# Altium PCB BB_PowerSupply_Module.PcbDoc
Units mil, origin at the board's own origin, x right, y up, seen from the top; angles counter-clockwise.
Board outline 6000 x 4000 mil, 2 copper layers (Top Layer, Bottom Layer); 33 components, 22 nets, 69 pads, 0 vias.
Unrouted connection lines stored in the file: 9.
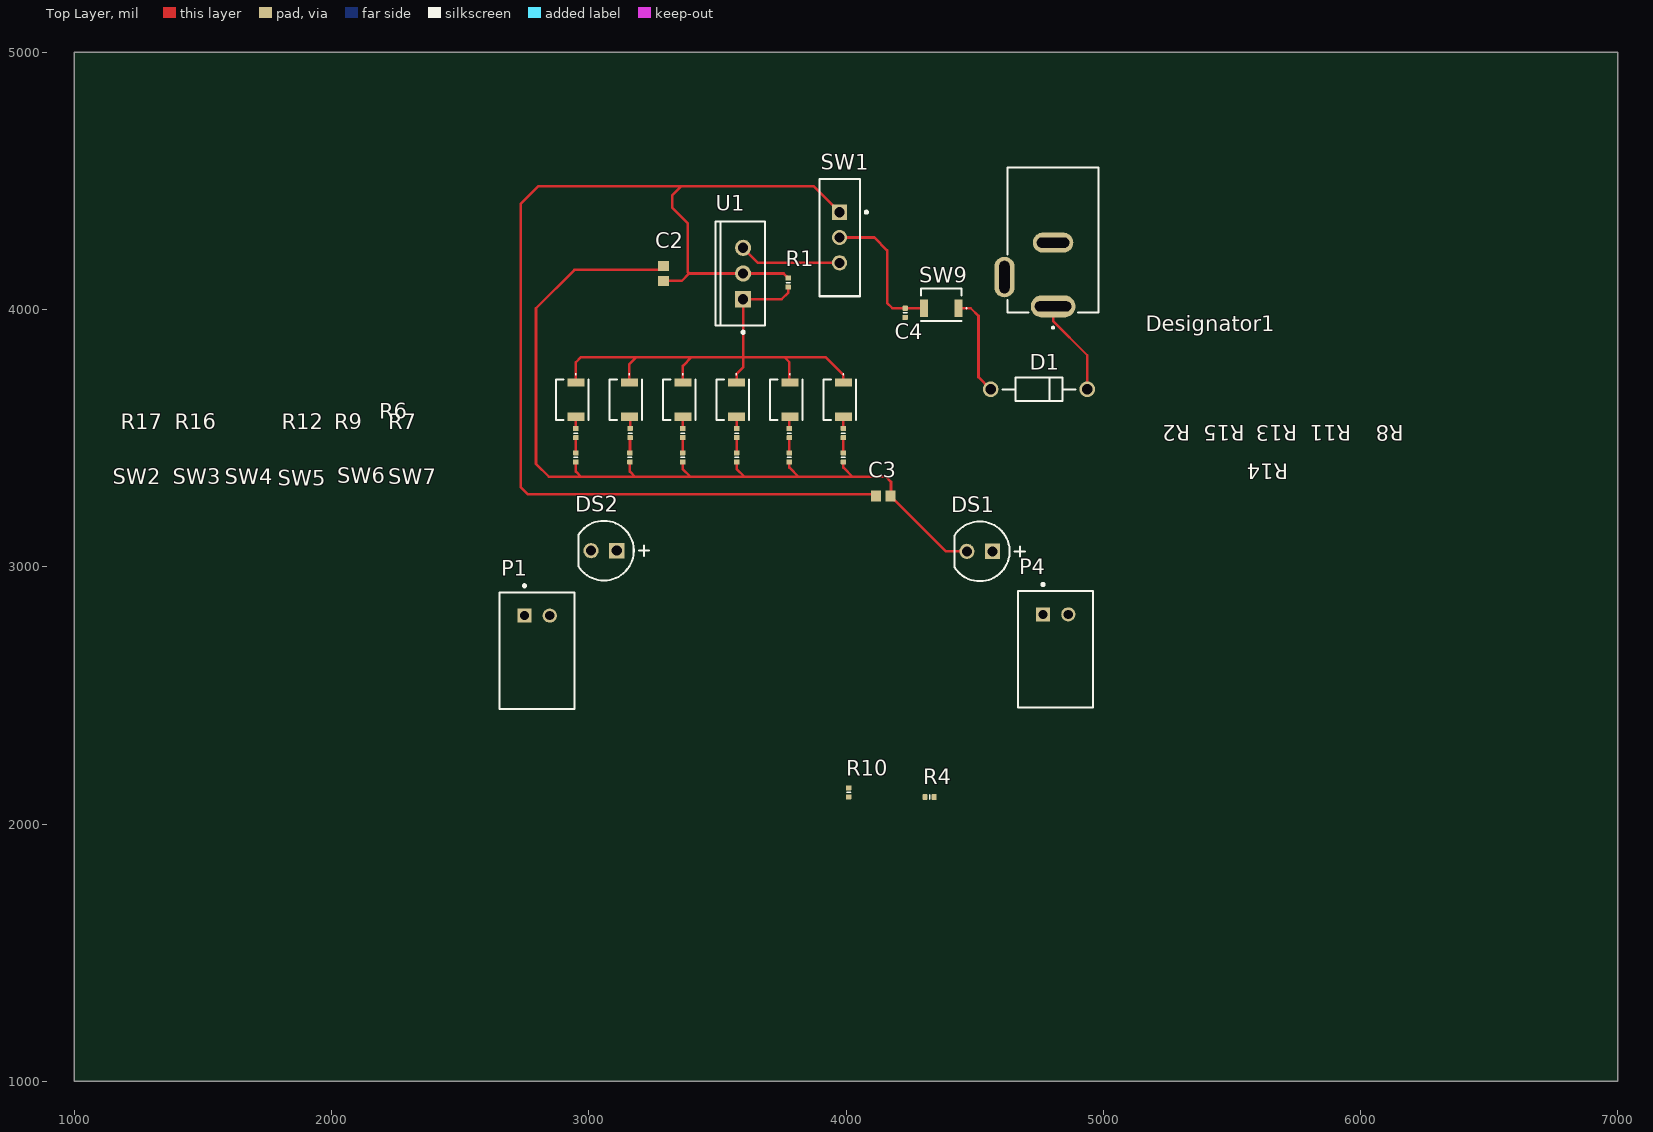
[diagram p0: Top Layer view]
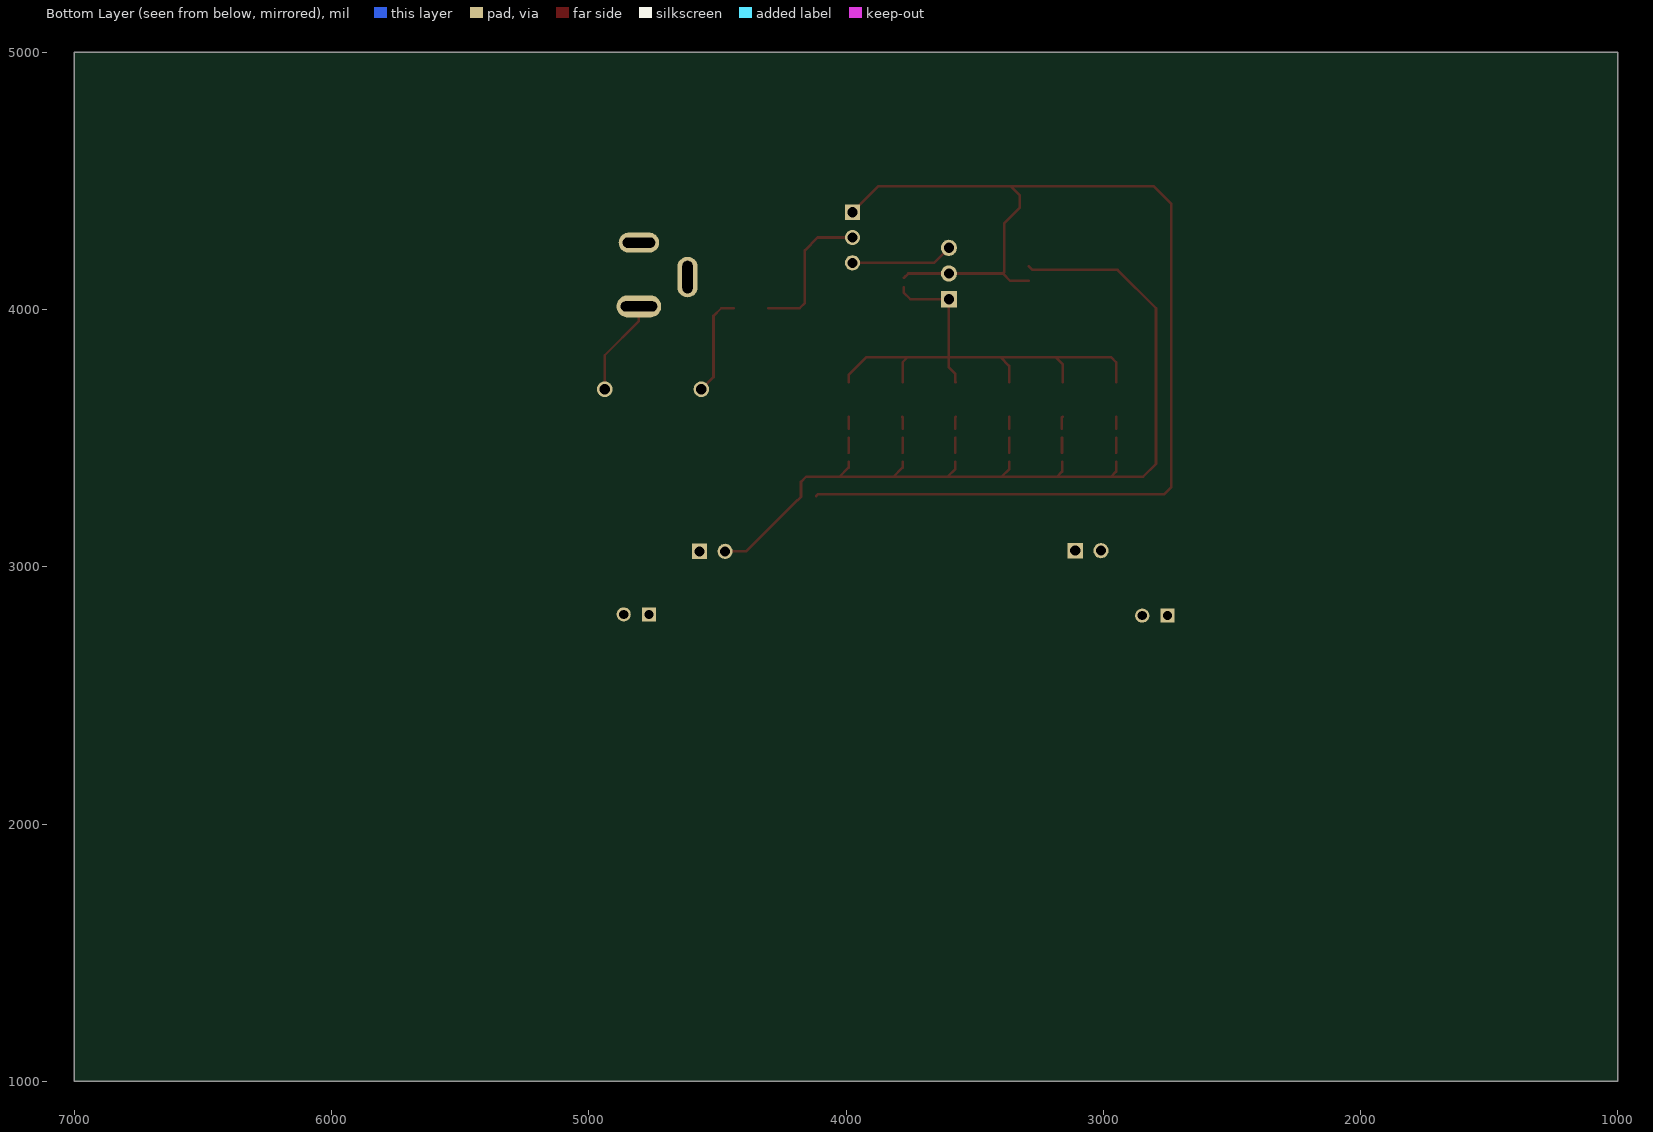
[diagram p1: Bottom Layer view, seen from below]
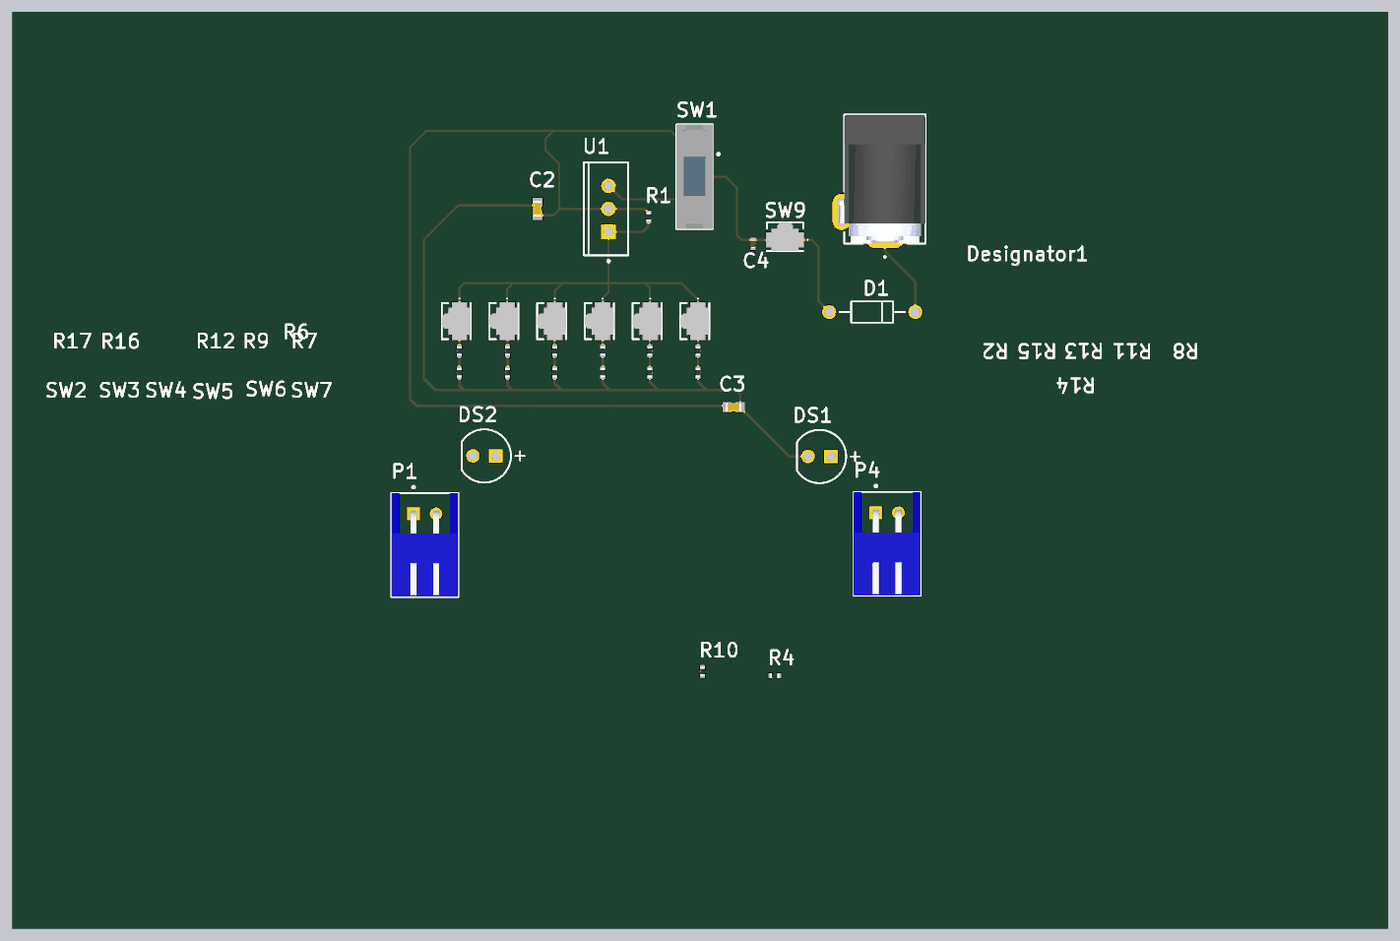
[diagram p2: 3D render of the assembled board from above, using the file's embedded part models]

## Layer stack, top to bottom
Top Solder: solder mask 0.4, Solder Resist, Dk 3.5
Top Layer: signal copper 1.4
Dielectric 1: dielectric 12.6, FR-4, Dk 4.8
Bottom Layer: signal copper 1.4
Bottom Solder: solder mask 0.4, Solder Resist, Dk 3.5

## Board outline
1000,1000 7000,1000 7000,5000 1000,5000

## Design rules (kind name [scope] priority, off if disabled: settings)
Clearance [All] p1: gap=10 ignorepadtopadclearanceinfootprint=FALSE
PolygonConnect [All] p1: connectstyle=Relief reliefconductorwidth=10 reliefentries=4 polygonreliefangle="90 Angle" airgapwidth=10
RoutingVias [All] p1: holewidth=28 width=50 viastyle="Through Hole" minholewidth=28 minwidth=50 maxholewidth=28 maxwidth=50
SolderMaskExpansion [All] p1: expansion=4 istentingtop=FALSE
SupplyNets "Schematic Supply Nets_1" [InNet('VCC_Left')] p1: voltage=0.000
SupplyNets "Schematic Supply Nets" [InNet('+12')] p2: voltage=0.000
Width [All] p1: maxlimit=10 minlimit=10 preferedwidth=10
30 further rules are at their usual default settings.

## Components (designator, comment, footprint, x,y, rotation, side; value= is the part's Value field where it differs from the comment)
C2 "Capacitor 1uF +/- 10% 16V 0603" CAPC1608X90X35ML15T15 3290,4140 r90 top value=1µF
C3 "Capacitor 1uF +/- 10% 16V 0603" CAPC1608X90X35ML15T15 4145,3275 r0 top value=10µF
C4 "Capacitor 680pF +/-20% 50V 0402" CAPC0402(1005)33_L 4230,3987.28 r270 top value="0.1 uF"
D1 "1N5819" ONSC-AXIAL_LEAD-2-59-10_P 4750,3690 r180 top
Designator1 "Comment" GCT_DCJ200-10-A-XX-K_REVA 4805,4270 r180 top
DS1 "" CGX-G502DC 4520,3060 r180 top
DS2 "" CGX-G502DC 3058.84,3062.51 r180 top
P1 "" JST-S2B-XH-A(LF)(SN)_V 2799.21,2810 r0 top
P4 "" JST-S2B-XH-A(LF)(SN)_V 4815,2815 r0 top
R1 "Resistor 10R  +/-1 % 0402 63 mW" RESC0402(1005)_L 3775,4105 r90 top value=240
R2 "Resistor 10R  +/-1 % 0402 63 mW" RESC0402(1005)_L 2950.05,3519.86 r270 top value=18
R4 "Resistor 10R  +/-1 % 0402 63 mW" RESC0402(1005)_L 4325,2105 r0 top value=10
R6 "Resistor 10R  +/-1 % 0402 63 mW" RESC0402(1005)_L 3990.01,3519.86 r270 top value=2
R7 "Resistor 10R  +/-1 % 0402 63 mW" RESC0402(1005)_L 3990,3425 r270 top value=910
R8 "Resistor 10R  +/-1 % 0402 63 mW" RESC0402(1005)_L 3780.01,3519.86 r270 top value=36
R9 "Resistor 10R  +/-1 % 0402 63 mW" RESC0402(1005)_L 3780,3425 r270 top value=300
R10 "Resistor 10R  +/-1 % 0402 63 mW" RESC0402(1005)_L 4010,2122.72 r90 top value=10
R11 "Resistor 10R  +/-1 % 0402 63 mW" RESC0402(1005)_L 3575.07,3519.86 r270 top value=390
R12 "Resistor 10R  +/-1 % 0402 63 mW" RESC0402(1005)_L 3575,3425 r270 top value=1100
R13 "Resistor 10R  +/-1 % 0402 63 mW" RESC0402(1005)_L 3365.01,3519.86 r270 top value=100
R14 "Resistor 10R  +/-1 % 0402 63 mW" RESC0402(1005)_L 3365,3425 r270 top value=620
R15 "Resistor 10R  +/-1 % 0402 63 mW" RESC0402(1005)_L 3160.61,3519.86 r270 top value=3.9
R16 "Resistor 10R  +/-1 % 0402 63 mW" RESC0402(1005)_L 3160,3425 r270 top value=390
R17 "Resistor 10R  +/-1 % 0402 63 mW" RESC0402(1005)_L 2950,3425 r270 top value=30
SW1 "" ESWI-EG1218_V 3975,4280 r270 top
SW2 "" OMRON-B3U-3000P_V 2950,3650 r270 top
SW3 "" OMRON-B3U-3000P_V 3158,3650 r270 top
SW4 "" OMRON-B3U-3000P_V 3366,3650 r270 top
SW5 "" OMRON-B3U-3000P_V 3574,3650 r270 top
SW6 "" OMRON-B3U-3000P_V 3782,3650 r270 top
SW7 "" OMRON-B3U-3000P_V 3990,3650 r270 top
SW9 "" OMRON-B3U-3000P_V 4370,4005 r180 top
U1 "" ONSC-TO-220-3-221AB-01 3600,4140 r180 top

## Footprints (in the part's own frame and the unit in brackets; to place one, negate y for a bottom-side part, rotate by r counter-clockwise, add the part's x,y. Pads: shape width x height; smd on the part's side, far side on the other; paste and mask are expansions set on the pad)
CAPC0402(1005)33_L [mm] "Chip Capacitor, Body 1.0x0.5mm, Height 0.33mm, IPC High Density"
  rrect25% 0.5x0.55 smd: 1(-0.45,0) 2(0.45,0)
  silkscreen extent 0,-0.2 0,0.2, body extent -0.5,-0.25 0.5,0.25, height 0.55
CAPC1608X90X35ML15T15 [mm] "Chip Capacitor, 2-Leads, Body 1.75x0.95mm, IPC Low Density"
  rect 1x1.1 smd: 1(-0.725,0) 2(0.725,0)
  body extent -0.87,-0.48 0.87,0.48, height 0.9
CGX-G502DC [mm] "THD, 2-Leads, Dia 5.9mm, Pin Spacing 2.54mm"
  rect 1.5x1.5 hole 1: 1(-1.27,0)
  round 1.5 hole 1: 2(1.27,0)
  silkscreen extent -4.45,-2.95 2.5,2.95, body extent -2.95,-2.95 2.5,2.95, height 9.1
ESWI-EG1218_V [mm] "THD, 3-Leads, Body 11.6x4mm, Pitch 2.5mm"
  rect 1.5x1.5 hole 1: 1(-2.5,0)
  round 1.5 hole 1: 2(0,0) 3(2.5,0)
  silkscreen extent -5.8,-2 5.8,2.78, body extent -5.8,-2 5.8,2, height 7.4
GCT_DCJ200-10-A-XX-K_REVA [mm]
  oval 4.4x2.2 hole 1 slot 3.6 at 0 deg: 1(0,6.55)
  oval 4x2 hole 1 slot 3.2 at 0 deg: 2(0,0.25)
  oval 2x4 hole 1 slot 3.2 at 90 deg: 3(4.8,3.65)
  silkscreen extent -4.5,-7.15 4.5,8.75, body extent -4.5,-7.15 5.05,7.15, height 11
JST-S2B-XH-A(LF)(SN)_V [mm] "Header, 2-Leads, Body 7.4x11.5mm, Pitch 2.5mm"
  rect 1.4x1.4 hole 0.9: 1(-1.25,0)
  round 1.4 hole 0.9: 2(1.25,0)
  silkscreen extent -3.7,-9.2 3.7,3.08, body extent -3.7,-9.2 3.7,2.3, height 5.95
OMRON-B3U-3000P_V [mm] "SMD, 2-Leads, Body 4x3.2mm"
  rect 0.8x1.7 smd: 1(-1.7,0) 2(1.7,0)
  silkscreen extent -2.55,-1.95 2,1.25, body extent -2,-1.95 2,1.25, height 1.2
ONSC-AXIAL_LEAD-2-59-10_P [mm] "AXIAL, 2-Leads, Diameter 2.35mm"
  round 1.55 hole 1.05: 1(-4.77,0) 2(4.77,0)
  silkscreen extent -3.59,-1.17 3.59,1.17, body extent -5.16,-1.17 5.16,1.17, height 2.34
ONSC-TO-220-3-221AB-01 [mm] "FM, 3-Leads, Body 10.3x4.85mm, Pitch 2.54mm"
  rect 1.6x1.6 hole 1: 1(0,2.54)
  round 1.6 hole 1: 2(0,0) 3(0,-2.54)
  silkscreen extent -2.18,-5.15 2.72,5.92, body extent -2.16,-5.15 2.69,5.15, height 19.68
RESC0402(1005)_L [mm] "Chip Resistor, Body 1.0x0.5mm, IPC High Density"
  rrect25% 0.5x0.55 smd: 1(-0.45,0) 2(0.45,0)
  silkscreen extent 0,-0.2 0,0.2, body extent -0.5,-0.25 0.5,0.25, height 0.3

## Part data
C2 C3: library part CMP-001-00004-6, "Chip Capacitor, 1 uF, +/- 10%, 16 V, 0603 (1608 Metric)", Capacitor Type=Ceramic, Case/Package=0603, Max Operating Temperature=125°C, Min Operating Temperature=-55°C, Tolerance=10%, Voltage Rating=16V, Mounting Technology=SM, Pins=2, RoHS Compliant=True
C4: library part CMP-001-00070-3, "Chip Capacitor, 680pF +/-20%, 50V, 0402, Thickness 0.33 mm", Case/Package=0402, Max Operating Temperature=85°C, Min Operating Temperature=-55°C, Tolerance=10%, Voltage Rating=50V, Mounting Technology=SMT, Pins=2
D1: library part CMP-004-00009-2, "Low Drop Power Schottky Rectifier, 40 V, 1 A, 2-Pin DO-41, RoHS", Case/Package=DO, Forward Current=1A, Manufacturer="ON Semiconductor", Max Operating Temperature=125°C, Max Surge Current=25A, Min Operating Temperature=-65°C, Package Description="2-Pin, Axial Lead, Diameter 2.35 mm", Package Reference=AXIAL_LEAD-2-59-10, Package Version="Rev. U, 02/2005", Peak Reverse Current=1mA, Datasheet URL=http://www.onsemi.cn/pub_link/Collateral/1N5817-D.PDF, Datasheet Version="Rev. 10, 07/2006", Manufacturer URL=http://www.onsemi.com/, Mounting Technology=TH, Package URL=http://www.onsemi.cn/pub_link/Collateral/59-10.PDF, Packaging=Bulk, Pins=2, RoHS Compliant=True
DS1 DS2: library part CMP-007-00008-2, "Green LED, 80 mW, 20 mA, -25 to 85 degC, 2-Pin THD", Case/Package=G502DC, Manufacturer="Shenzhen CGX", Package Description="2-Pin Through Hole Device, Dia 5.9 mm", Datasheet URL=http://datasheet.octopart.com/G502DC-Chengguangxing-datasheet-62330340.pdf, Datasheet Version=Sep-14, Manufacturer URL=http://szcgx.com/, Mounting Technology=TH, Package Reference=G502DC, RoHS Compliant=Unknown
P1 P4: library part CMP-002-00032-2, "Male Header, Pitch 2.5 mm, 1 x 2 Position, Height 6.1 mm, Tail Length 3.4 mm, -25 to 85 degC, RoHS, Bulk", Case/Package=S2B-XH-A(LF)(SN), Manufacturer=JST, Max Operating Temperature=85°C, Min Operating Temperature=-25°C, Package Description="XH Series Disconnectable Crimp Style Connector, Pitch 2.5 mm, 1 x 2 Position, Height 6.1 mm, Tail Length 3.4 mm", Connector Type=Header, Datasheet URL=http://www.jst-mfg.com/product/pdf/eng/eXH.pdf, Datasheet Version=May-16, Gender=Male, Manufacturer URL=http://www.jst.com/home2.html, Mounting Technology=TH, Package Reference=S2B-XH-A(LF)(SN), RoHS Compliant=Unknown
R1 R2 R4 R6 R7 R8 R9 R10 R11 R12 R13 R14 R15 R16 R17: library part CMP-009-00152-3, "Chip Resistor, 10 Ohms, +/-1 %, 63 mW, -55 to 155 degC, 0402", Case/Package=0402, Max Operating Temperature=155°C, Min Operating Temperature=-55°C, Power=63mW, Tolerance=1%, Pins=2
SW1: library part CMP-011-00006-2, "Slide Switch, SPDT, 500 V, -20 to 70 degC, 3-Pin THD, RoHS, Bulk", Case/Package=EG1218, Contact Current Rating=200mA, Manufacturer=E-Switch, Max Operating Temperature=70°C, Min Operating Temperature=-20°C, Operating Force=250gf, Package Description="3-Pin Through Hole Device, Body 11.6 x 4 mm, Pitch 2.5 mm", Package Quantity=1000, Voltage Rating (AC)=30V, Contact Finish=Silver, Contact Material=Copper, Contact Plating=Silver, Current Rating=200mA, Datasheet URL=https://www.e-switch.com/system/asset/product_line/data_sheet/119/EG.pdf, Datasheet Version=Oct-15, Manufacturer URL=http://www.e-switch.ch/en/, Mounting Technology=TH, Package Reference=EG1218, Packaging=Bulk, Pins=3, RoHS Compliant=True, Throw Configuration=SPDT, Voltage Rating (DC)=30V
SW2 SW3 SW4 SW5 SW6 SW7 SW9: library part CMP-011-00005-2, "Tactile Switch, SPST-NO, 0.05 A, 12 V, -25 to 70 degC, 2-Pin SMD, RoHS, Tape and Reel", Case/Package=B3U-3000P, Contact Current Rating=50mA, IP Rating=IP40, Manufacturer="Omron Electronic Components", Max Contact Resistance=100mohm, Max Operating Temperature=70°C, Max Voltage Rating (DC)=12V, Min Operating Temperature=-25°C, Operating Force=162gf, Package Description="2-Pin Surface Mount Device, Body 4 x 3.2 mm", Package Quantity=4000, Contact Material=Silver, Current Rating=50mA, Datasheet URL=https://www.omron.com/ecb/products/pdf/en-b3u.pdf, Datasheet Version=Jan-15, Manufacturer URL=http://www.omron.com/, Max Current Rating=50mA, Mounting Technology=SM, Package Reference=B3U-3000P, Packaging=TapeandReel, RoHS Compliant=True, Throw Configuration=SPST, Voltage Rating=12V, Voltage Rating (DC)=12V
U1: library part CMP-019-00023-3, "Adjustable Output, Positive Voltage Regulator, 1.5 A, 0 to 125 degC, 3-Pin TO-220 (221AB-01), Pb-Free, Rail", Case/Package=TO-220, Manufacturer="ON Semiconductor", Max Input Voltage=40V, Max Operating Temperature=125°C, Max Ouput Current=1.5A, Min Input Voltage=4.2V, Min Operating Temperature=0°C, Output Voltage=1.2V, Package Description="3-Pin Flange Mount, Vertical Straight Lead, Body 9.97 x 4.445 mm, Pitch 2.54 mm", Package Quantity=50, Package Reference=TO-220-3-221AB-01, Package Version="Rev. A, 11/2010", Datasheet URL=http://www.onsemi.com/pub_link/Collateral/LM317-D.PDF, Datasheet Version="Rev. 14, 01/2016", Manufacturer URL=http://www.onsemi.com/, Mounting Technology=TH, Output Current=1.5A, Outputs=1, Packaging=Rail/Tube, Pins=3, RoHS Compliant=True

## Nets (pads, with @x,y where several pads share a name; then routed paths per layer and width w, separated by ;. In a path a pad name is that pad's centre, name@x,y a point inside that pad or via, vN(x,y) a via of type N, cw(c..) or ccw(c..) an arc to the next point about the centre after c; other vN are vias at no path point)
+12: D1.1 Designator1.1 | length 377.1
  Top Layer w10: Designator1.1 4805,3955 4937.8,3822.2 D1.1
NetC2_2: C2.2 C3.2 DS1.2 R7.2 R9.2 R12.2 R14.2 R16.2 R17.2 | length 3433.1
  Top Layer w10: R17.2 2950,3370 2970,3350 ; R16.2 3160,3370 3180,3350 ; C2.2 3275.31,4153.86 2943.86,4153.86 2795,4005 2795,3400 2845,3350 2970,3350 ; R14.2 3365,3380 3395,3350 ; R12.2 3575,3380 3605,3350 ; R9.2 3780,3385 3815,3350 ; R7.2 3990,3385 4025,3350 ; DS1.2 4388.54,3060 4190.2,3258.35 4188.23,3258.35 4173.54,3273.03 C3.2 4175,3276.46 4175,3330 4155,3350 4025,3350 ; 2970,3350 3180,3350 ; 3180,3350 3395,3350 ; 3395,3350 3605,3350 ; 3605,3350 3815,3350 ; 3815,3350 4025,3350
NetC4_1: C4.1 SW1.2 SW9.2 | length 562.1
  Top Layer w10: SW1.2 4110,4280 4160,4230 4160,4025 4180,4005 C4.1 SW9.2
NetD1_2: D1.2 SW9.1 | length 395.1
  Top Layer w10: SW9.1 4485,4005 4515,3975 4515,3737.2 D1.2
NetDS1_1: DS1.1 R4.1
NetDS2_1: DS2.1 R10.1
NetP4_1: P4.1 R10.2
NetR1_1: R1.1 SW2.1 SW3.1 SW4.1 SW5.1 SW6.1 SW7.1 U1.1 | length 2052.7
  Top Layer w10: SW2.1 2950,3795 2970,3815 3185,3815 ; SW3.1 3158,3788 3185,3815 ; SW4.1 3366,3781 3400,3815 ; SW5.1 3575,3717.93 3575,3750 3600,3775 3600,3815 ; R1.1 3775,4065 3750,4040 U1.1 3600,3815 ; SW6.1@3780,3716.93 3780,3795 3760,3815 ; SW7.1 3990,3745 3920,3815 3760,3815 ; 3185,3815 3400,3815 ; 3400,3815 3600,3815 ; 3600,3815 3760,3815
NetR2_1: R2.1 SW2.2 | length 45.5
  Top Layer w10: SW2.2 2950.05,3583.02 R2.1
NetR2_2: R2.2 R17.1 | length 59.4
  Top Layer w10: R17.1 R2.2@2950.03,3502.12
NetR6_1: R6.1 SW7.2 | length 45.5
  Top Layer w10: R6.1 SW7.2
NetR6_2: R6.2 R7.1 | length 59.4
  Top Layer w10: R7.1 R6.2
NetR8_1: R8.1 SW6.2 | length 46.3
  Top Layer w10: R8.1 3780.01,3581.08 SW6.2
NetR8_2: R8.2 R9.1 | length 59.4
  Top Layer w10: R9.1 R8.2
NetR11_1: R11.1 SW5.2 | length 45.9
  Top Layer w10: SW5.2 3575.07,3582 R11.1
NetR11_2: R11.2 R12.1 | length 59.5
  Top Layer w10: R12.1 R11.2@3575.03,3502.11
NetR13_1: R13.1 SW4.2 | length 45.9
  Top Layer w10: R13.1 3365.01,3582.08 SW4.2
NetR13_2: R13.2 R14.1 | length 59.4
  Top Layer w10: R14.1 R13.2
NetR15_1: R15.1 SW3.2 | length 46.6
  Top Layer w10: SW3.2 3160.61,3580.46 R15.1
NetR15_2: R15.2 R16.1 | length 59.7
  Top Layer w10: R16.1 3160.3,3443.02 3160.3,3501.84 R15.2
NetSW1_3: SW1.3 U1.3 | length 399.2
  Top Layer w10: U1.3 3658.43,4181.57 SW1.3
VCC_Left: C2.1 C3.1 C4.2 DS2.2 P1.1 P1.2 P4.2 R1.2 R4.2 SW1.1 U1.2 | length 4693
  Top Layer w10: C2.1 3361.46,4111.46 3390,4140 ; R1.2 3774.02,4122.72 3769.17,4127.56 3769.17,4128.54 3757.72,4140 U1.2 3390,4140 ; SW1.1 3873.43,4480 3360,4480 ; C3.1 4110,3281.46 2763.54,3281.46 2735,3310 2735,4410 2805,4480 3360,4480 ; 3360,4480 3325,4445 3325,4395 3385,4335 3385,4145 3390,4140
pads on no net: Designator1.2 Designator1.3

## Silkscreen, mask and mechanical layers (free items; w line width, h text height)
Mechanical 1:
  lines w10: 2595,1585 2595,4585 5035,4585 5035,1585
Mechanical 13:
  lines w10: 2595,1585 3080,1585 3080,2690 4515,2690 4520,2685 4520,1590 4520,1580 4530,1580 5035,1580